# EAGLE board skylift-02_logo (EAGLE 6.4)
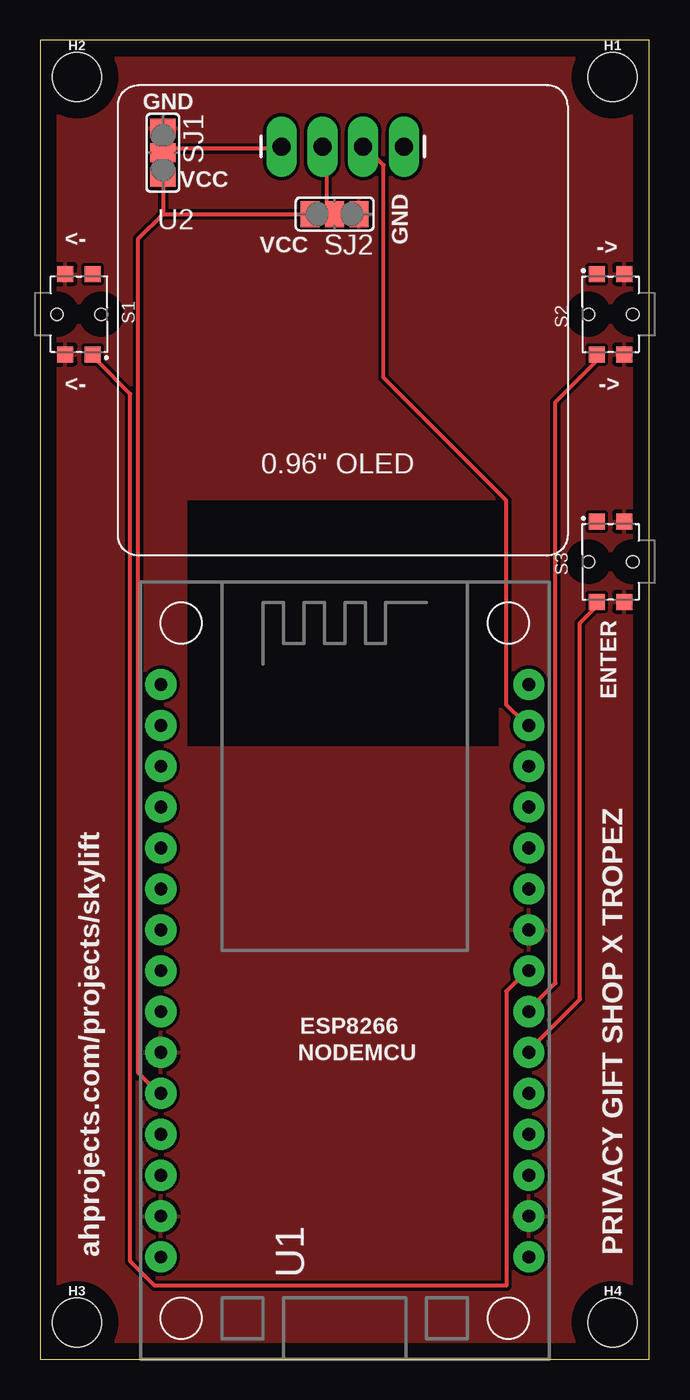
[diagram p0: board, top side]
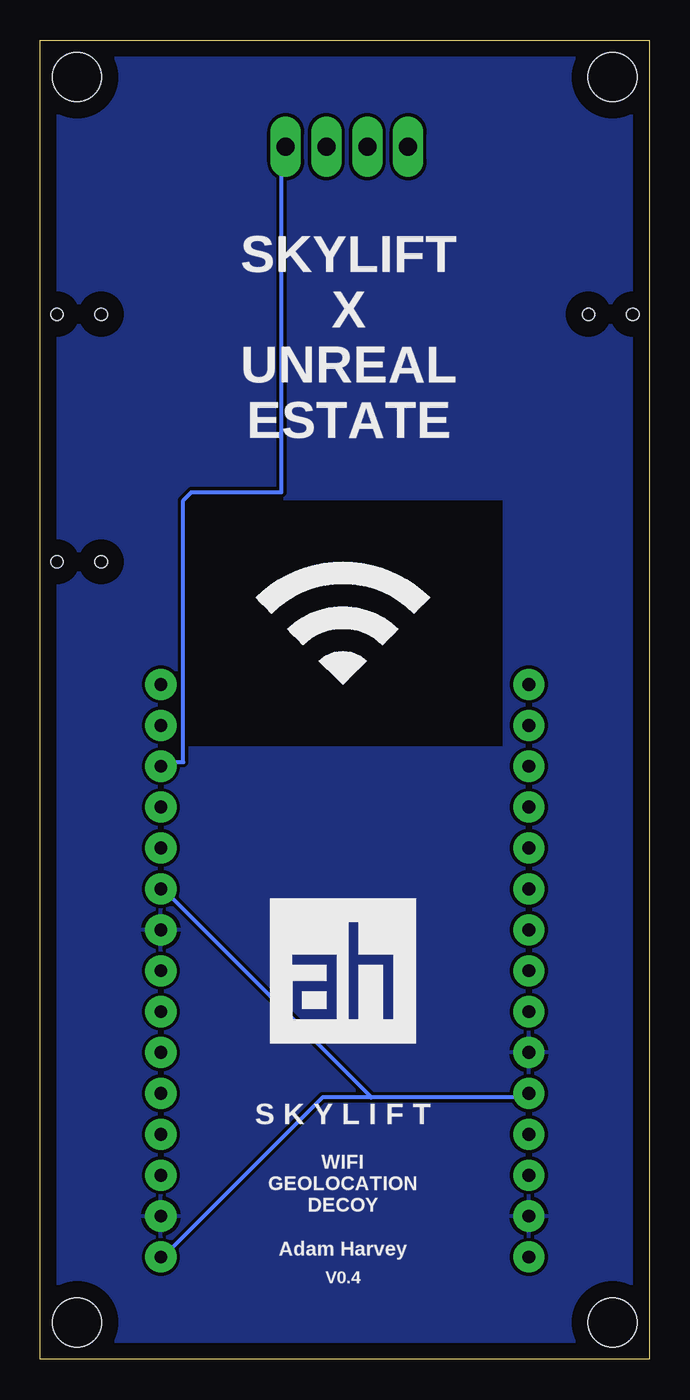
[diagram p1: board, bottom side, seen from below]

Size 37.85 x 81.92 mm. Coordinates in mm from the lower left corner, seen from the top.
Outline: 0,0 37.85,0 37.85,81.92 0,81.92 0,0
Copper layers (1*16): Top 0.035mm / dielectric 1.5mm / Bottom 0.035mm
Design rules "default": minimum track width 10mil, minimum drill 24mil, track to track 8mil, track to pad 8mil, pad to pad 8mil, via to via 8mil, smd to smd 8mil, copper to edge 40mil, drill to drill 8mil, minimum pad ring 10mil, minimum via ring 8mil, stop-mask expansion 4mil, vias tented up to drill 0mil, thermal gap 10mil
tRestrict: area 9.1,38.1 to 28.4,53.3
bRestrict: area 9.1,38.1 to 28.4,53.3

## Footprints (pad centres in the part's own frame; a part is rotated, then mirrored left to right if it is on the bottom)
STAND-OFF-TIGHT = hole 3.048: 0,0
436333045822 = smd 1 x 1: 1 2.5,0.85; 2 2.5,-0.85; 3 -2.5,0.85; 4 -2.5,-0.85 | hole 0.75: 0,-1.375; 0,1.375
SJ_2 = smd 1.168 x 1.6: 1 -1.524,0; 2 0,0; 3 1.524,0
ESP12E_DEVKIT = drill 0.8 pad 1.93: 3V3@0 -11.43,-7.62; 3V3@1 11.43,5.08; 3V3@2 11.43,-17.78; AD0 -11.43,17.78; CLK -11.43,-2.54; CMD -11.43,2.54; D0 11.43,17.78; D1 11.43,15.24; D2 11.43,12.7; D3 11.43,10.16; D4 11.43,7.62; D5 11.43,0; D6 11.43,-2.54; D7 11.43,-5.08; D8 11.43,-7.62; EN -11.43,-10.16; GND@0 -11.43,-5.08; GND@1 -11.43,-15.24; GND@2 11.43,2.54; GND@3 11.43,-15.24; RST -11.43,-12.7; RSV@0 -11.43,15.24; RSV@1 -11.43,12.7; RX 11.43,-10.16; SD0 -11.43,0; SD1 -11.43,5.08; SD2 -11.43,7.62; SD3 -11.43,10.16; TX 11.43,-12.7; VIN -11.43,-17.78
I2C_OLED_PACKAGE = drill 1.118 pad 1.88 long: GND 0,0; SCL 5.08,0; SDA 7.62,0; VCC 2.54,0

## Placement (x,y rotation side)
FRAME1  FRAME-LETTERNO_PACKAGE  [DUMMY]  -29.21,86.36 0 top  (outside the outline)
H1  STAND-OFFTIGHT  [STAND-OFF-TIGHT]  35.56,79.63 0 top
H2  STAND-OFFTIGHT  [STAND-OFF-TIGHT]  2.29,79.63 0 top
H3  STAND-OFFTIGHT  [STAND-OFF-TIGHT]  2.29,2.29 0 top
H4  STAND-OFFTIGHT  [STAND-OFF-TIGHT]  35.56,2.29 0 top
S1  [436333045822]  2.41,64.9 270 top
S2  [436333045822]  35.43,64.9 90 top
S3  [436333045822]  35.43,49.53 90 top
SJ1  [SJ_2]  7.62,74.93 270 top
SJ2  [SJ_2]  18.29,71.12 180 top
U1  ESP12E_DEVKIT  [ESP12E_DEVKIT]  18.92,24.13 0 top
U2  I2C_OLED  [I2C_OLED_PACKAGE]  14.99,75.31 0 top

## Library data of the parts
FRAME1 = SparkFun-Aesthetics; DESIGNER: Nobody; VERSION: v01
H1-H4 = SparkFun-Hardware
S1-S3 = Eagle_SWITCHES (rev17e)
SJ1 SJ2 = SparkFun-Retired
U1 = ESP12E_DEVKIT
U2 = DIYMall_OLED

## Nets
D5: S1.1 U1.D5
D6: S2.3 U1.D6
D7: S3.3 U1.D7
GND: S1.2 S1.4 S2.2 S2.4 S3.2 S3.4 SJ1.1 SJ2.1 U1.GND@0 U1.GND@1 U1.GND@2 U1.GND@3
N$4: SJ1.2 U2.GND
N$5: SJ2.2 U2.VCC
SCL: U1.D1 U2.SCL
SDA: U1.D2 U2.SDA
VCC: SJ1.3 SJ2.3 U1.3V3@0 U1.3V3@1 U1.3V3@2
VIN: U1.VIN

## Tracks (layer width: path | path; a pad name or v marks a point on that pad's centre or on a via)
D5
  Top 0.254: S1.1 3.56,61.98 5.59,59.94 5.59,6.1 7.11,4.57 28.96,4.57 28.96,22.86 29.97,23.88 U1.D5
D6
  Top 0.254: S2.3 34.54,61.98 32,59.44 32,23.37 30.48,21.84 U1.D6
D7
  Top 0.254: S3.3 34.54,46.74 33.53,45.72 33.53,22.35 30.48,19.3 U1.D7
GND
  pour Top: 0,81.92 37.85,81.92 37.85,0 0,0
  pour Bottom: 0,81.92 37.85,81.92 37.85,0 0,0
N$4
  Top 0.254: SJ1.2 7.62,75.18 14.73,75.18 U2.GND
N$5
  Top 0.254: SJ2.2 17.78,71.63 17.78,75.18 U2.VCC
SCL
  Top 0.254: U2.SCL 20.32,75.18 21.34,74.17 21.34,60.96 28.96,53.34 28.96,40.64 29.97,39.62 U1.D1
SDA
  Bottom 0.254: U2.SDA 22.86,75.18 22.86,53.85 28.45,53.85 28.96,53.34 28.96,37.08 29.97,37.08 U1.D2
VCC
  Top 0.254: 7.62,71.12 SJ2.3 | SJ1.3 7.62,71.12 | 7.62,71.12 6.1,69.6 6.1,17.78 7.11,16.76 U1.3V3@0
  Bottom 0.254: 17.27,16.26 7.62,16.26 U1.3V3@0 | 17.27,16.26 20.32,16.26 29.97,6.6 U1.3V3@2 | 17.27,16.26 29.97,28.96 U1.3V3@1

## Text on the board
tPlace: GND | VCC | GND | VCC | <- | -> | <- | -> | ENTER | ESP8266 | NODEMCU | ahprojects.com/projects/skylift | PRIVACY GIFT SHOP X TROPEZ
bPlace: SKYLIFT / X / UNREAL / ESTATE | S K Y L I F T | WIFI / GEOLOCATION / DECOY | Adam Harvey | V0.4